# Altium PCB lps_regulator_rev_11.PcbDoc (part 1 of 2)
Units mil, origin at the board's own origin, x right, y up, seen from the top; angles counter-clockwise.
Board outline 5361 x 2466 mil, 2 copper layers (Top Layer, Bottom Layer); 135 components, 51 nets, 344 pads, 191 vias.
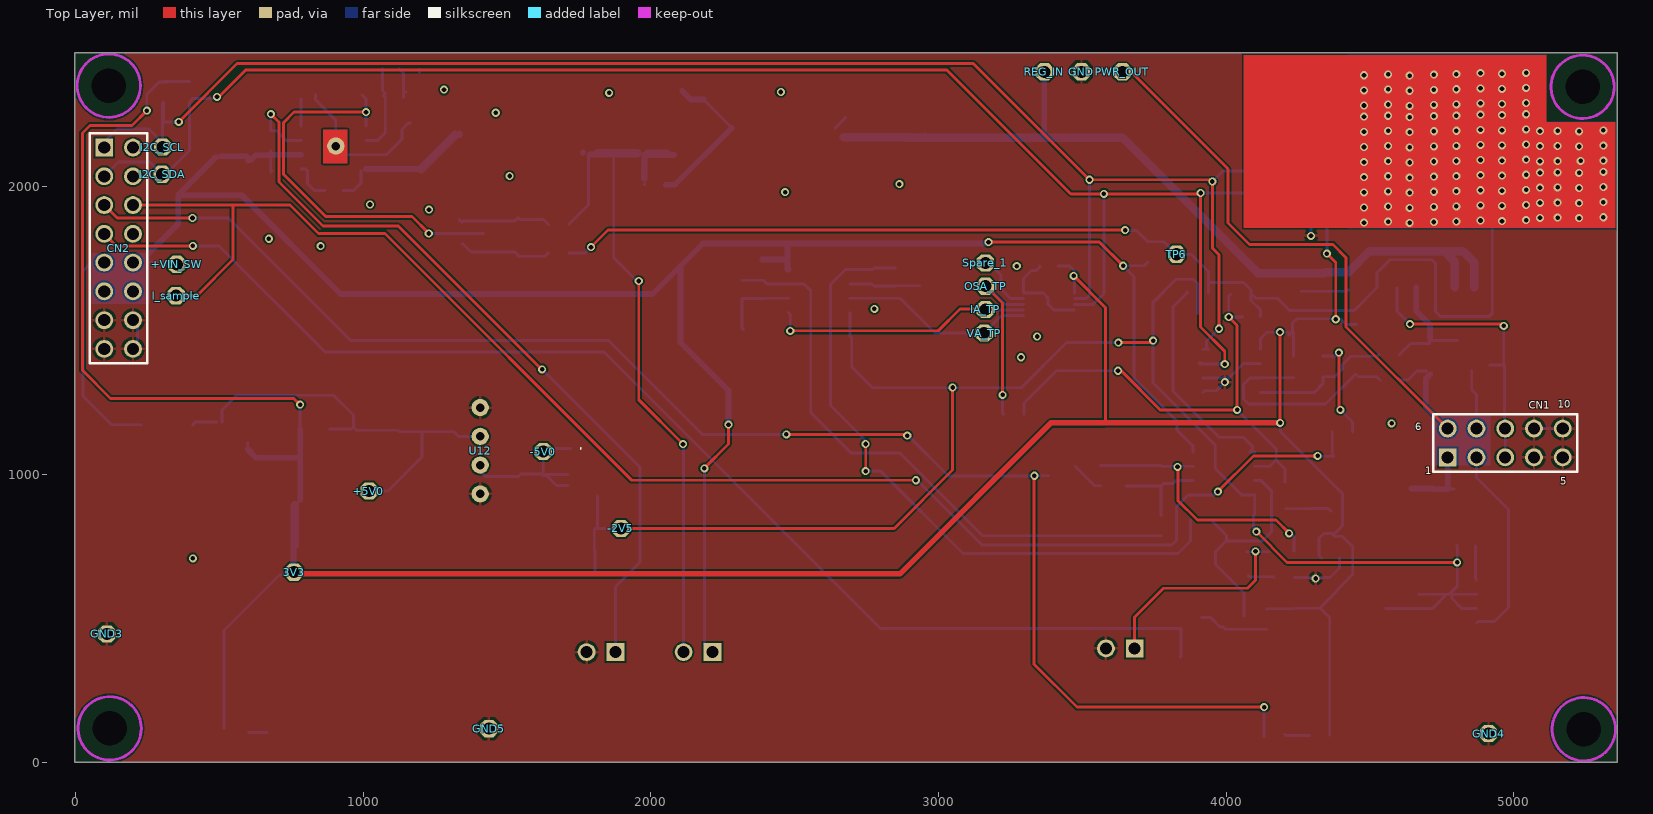
[diagram p0: Top Layer view]
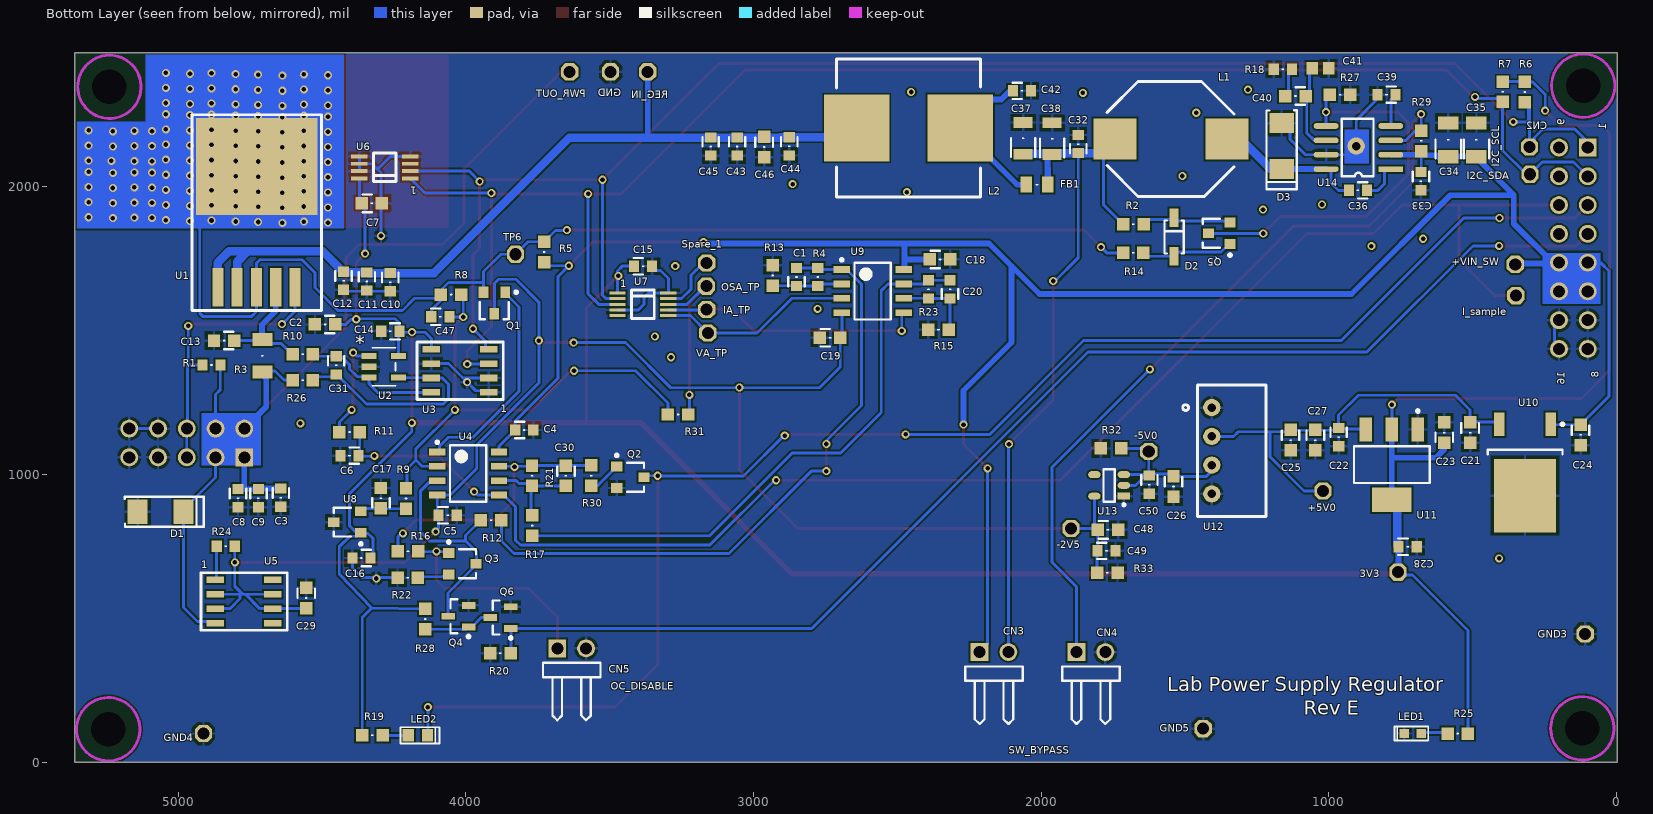
[diagram p1: Bottom Layer view, seen from below]
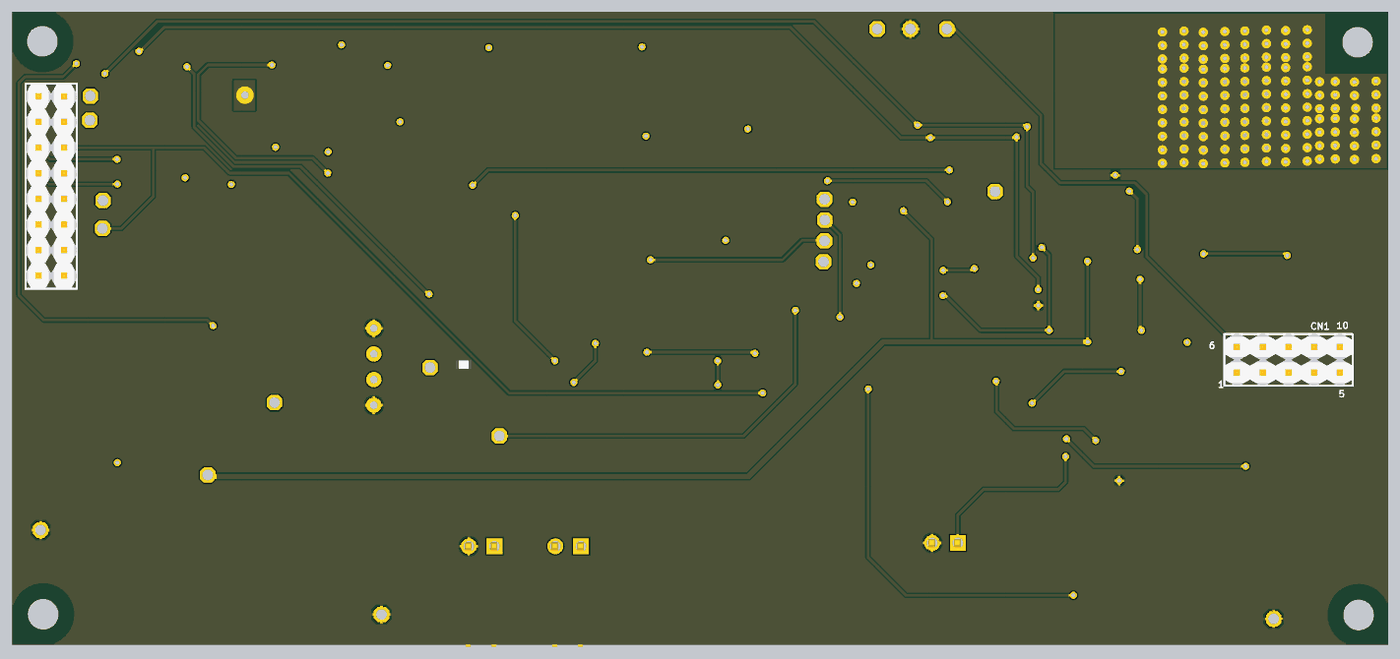
[diagram p3: 3D render of the assembled board from above, using the file's embedded part models]
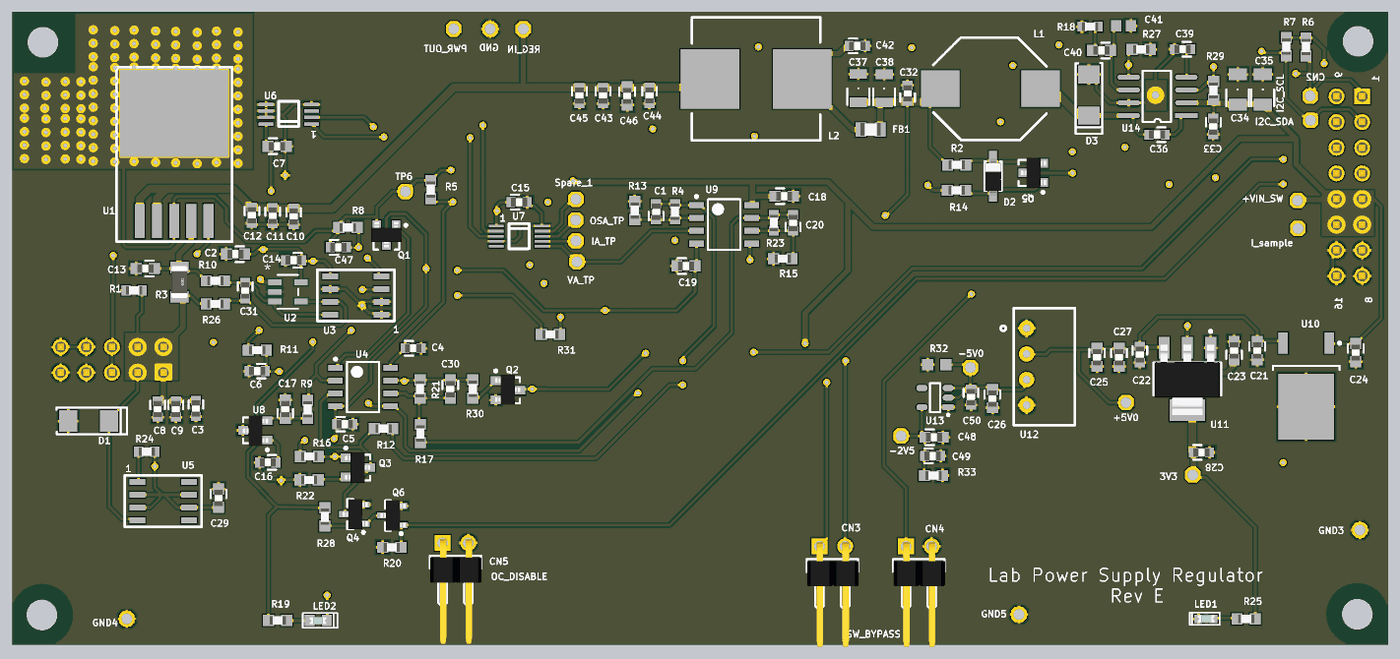
[diagram p4: 3D render of the assembled board from below, using the file's embedded part models]

## Layer stack, top to bottom
Top Solder: solder mask 0.4, Solder Resist, Dk 3.5
Top Layer: signal copper 1.4
Dielectric 1: dielectric 12.6, FR-4, Dk 4.8
Bottom Layer: signal copper 1.4
Bottom Solder: solder mask 0.4, Solder Resist, Dk 3.5

## Board outline
-2,0 5359,0 5359,2466 -2,2466

## Design rules (kind name [scope] priority, off if disabled: settings)
Clearance [All] p1: gap=6 ignorepadtopadclearanceinfootprint=FALSE except(0: Arc-Hole Track-Hole SMDPad-Hole THPad-Hole Via-Hole Fill-Hole Poly-Hole Region-Hole Text-Hole)
HoleSize [All] p1: absolutevalues=TRUE maxlimit=200 minlimit=1 maxpercent=80.000 minpercent=20.000
MinimumSolderMaskSliver [All] p1: minsoldermaskwidth=1
PolygonConnect [All] p1: connectstyle=Relief reliefconductorwidth=10 reliefentries=4 polygonreliefangle="90 Angle" airgapwidth=10
RoutingVias [All] p1: holewidth=28 width=50 viastyle="Through Hole" minholewidth=28 minwidth=50 maxholewidth=28 maxwidth=50
SilkToSilkClearance [All] p1: silktosilkclearance=2
SilkToSolderMaskClearance [IsPad] p1: minsilkscreentomaskgap=1 clearancetoexposedcopper=TRUE
SolderMaskExpansion [All] p1: expansion=4
Width [All] p1: maxlimit=50 minlimit=10 preferedwidth=10
26 further rules are at their usual default settings.

## Components (designator, comment, footprint, x,y, rotation, side; value= is the part's Value field where it differs from the comment)
3V3 "TestPoint_BLK" "TestPoint-TH 42 mil"#1 784,640 r90 top
+5V0 "TestPoint_BLK" "TestPoint-TH 42 mil"#2 1020,943 r90 top
+VIN_SW "TestPoint_BLK" "TestPoint-TH 42 mil"#2 352,1731 r90 top
-2V5 "TestPoint_BLK" "TestPoint-TH 42 mil"#2 1896,813 r90 top
-5V0 "TestPoint_BLK" "TestPoint-TH 42 mil"#2 1626,1080 r90 top
C1 "100pF" CAPC0603(1608)_N 2850.72,1687 r90 bottom
C2 "0.1uF" CAPC0603(1608)_M 4489,1522 r0 bottom
C3 "0.1uF" CAPC0603(1608)_N 4643,920 r270 bottom
C4 "0.1uF" CAPC0603(1608)_N 3797,1155 r180 bottom
C5 "0.1uF" CAPC0603(1608)_N 4063,859 r180 bottom
C6 "10uF" CAPC0603(1608)_N 4404.5,1066 r0 bottom
C7 "0.1uF" CAPC0603(1608)_M 4327,1943 r180 bottom
C8 "10uF" CAPC0603(1608)_N 4792,918 r270 bottom
C9 "10uF" CAPC0603(1608)_N 4721,918 r270 bottom
C10 "10uF" CAPC0603(1608)_N 4262.49,1669 r270 bottom
C11 "10uF" CAPC0603(1608)_N 4344,1671.5 r270 bottom
C12 "0.1uF" CAPC0603(1608)_N 4425,1674 r270 bottom
C13 "0.1uF" CAPC0603(1608)_M 4840,1466 r0 bottom
C14 "0.1uF" CAPC0603(1608)_N 4262.5,1498 r0 bottom
C15 "0.1uF" CAPC0603(1608)_N 3383.88,1724.56 r180 bottom
C16 "0.1uF" CAPC0603(1608)_N 4363,710 r0 bottom
C17 "1uF" CAPC0603(1608)_M 4295,918 r90 bottom
C18 "0.1uF" CAPC0603(1608)_M 2351.57,1748 r180 bottom
C19 "0.1uF" CAPC0603(1608)_M 2734,1476 r180 bottom
C20 "100pF" CAPC0603(1608)_N 2316.72,1644 r90 bottom
C21 "0.1uF" CAPC0603(1608)_M 509,1146 r270 bottom
C22 "10uF" CAPC0603(1608)_N 966,1130.43 r270 bottom
C23 "0.1uF" CAPC0603(1608)_M 599,1146 r90 bottom
C24 "1uF" CAPC0603(1608)_M 125,1138 r270 bottom
C25 "0.1uF" CAPC0603(1608)_M 1133,1120 r270 bottom
C26 "0.1uF" CAPC0603(1608)_M 1540,958.57 r270 bottom
C27 "10uF" CAPC0603(1608)_M 1047,1120 r270 bottom
C28 "10uF" CAPC0603(1608)_N 726,749 r180 bottom
C29 "0.1uF" CAPC0603(1608)_M 4555,571 r270 bottom
C30 "0.1uF" CAPC0603(1608)_M 3652,996 r270 bottom
C31 "0.1uF" CAPC0603(1608)_N 4451,1380 r270 bottom
C32 "0.1uF" CAPC0603(1608)_N 1871,2149 r90 bottom
C33 "0.01uF" CAPC0603(1608)_N 680,2020 r270 bottom
C34 "4.7uF" CAPC1206(3216)_N 585,2164 r90 bottom
C35 "4.7uF" CAPC1206(3216)_N 487,2164 r90 bottom
C36 "0.1uF" CAPC0603(1608)_N 899,1988 r0 bottom
C37 "47UF" CAPC1206(3216)_L 2063,2169 r90 bottom
C38 "47UF" CAPC1206(3216)_L 1962,2168 r90 bottom
C39 "0.01uF" CAPC0603(1608)_N 799.57,2321 r0 bottom
C40 "150pF" CAPC0603(1608)_M 1116,2316 r0 bottom
C41 "8.2nF" CAPC1608X87X35ML15T15 1029.46,2412 r0 bottom
C42 "0.1uF" CAPC0603(1608)_N 2067,2334 r180 bottom
C43 "10uF" CAPC0603(1608)_N 3057,2140.5 r270 bottom
C44 "0.1uF" CAPC0603(1608)_N 2876,2141 r270 bottom
C45 "10uF" CAPC0603(1608)_N 3149,2140.5 r270 bottom
C46 "1uF" CAPC0603(1608)_M 2963,2139 r270 bottom
C47 "0.1uF" CAPC0603(1608)_N 4088.5,1549 r180 bottom
C48 "0.1uF" CAPC0603(1608)_M 1768,808 r180 bottom
C49 "10uF" CAPC0603(1608)_N 1773,735 r180 bottom
C50 "10uF" CAPC0603(1608)_N 1624,965 r270 bottom
CN1 "Header 5X2A" HDR2X5_CEN 4770,1060 r0 top
CN2 "Header 8X2A" HDR2X8_CEN 100,2137 r270 top locked
CN3 "Header 2H" HDR1X2H 2214,383 r180 bottom
CN4 "Header 2H" HDR1X2H 1877,383 r180 bottom
CN5 "Header 2H" HDR1X2H 3682,396 r180 bottom
D1 "B340A" DO-214AC 5061,871 r180 bottom
D2 "1N4448W-E3-18" SOD123 1538,1826 r90 bottom
D3 "B340A" DO-214AC 1164.46,2142 r270 bottom
FB1 "300 Ohm @ 100MHz, 0805" RESC0805(2012)_N 2014.6,2008 r0 bottom
GND "TestPoint_BLK" "TestPoint-TH 42 mil"#3 3535,2385 r90 top
GND3 "TestPoint_BLK" "TestPoint-TH 42 mil"#2 109,446 r90 top
GND4 "TestPoint_BLK" "TestPoint-TH 42 mil"#4 4912,83 r90 top
GND5 "TestPoint_BLK" "TestPoint-TH 42 mil"#2 1437,117 r90 top
I2C_SCL "TestPoint_BLK" "TestPoint-TH 42 mil"#5 300.5,2142.57 r90 top
I2C_SDA "TestPoint_BLK" "TestPoint-TH 42 mil"#6 304,2046 r90 top
I_sample "TestPoint_BLK" "TestPoint-TH 42 mil"#2 350,1622 r90 top
IA_TP "TestPoint_BLK" "TestPoint-TH 42 mil"#2 3162.88,1574 r90 top
L1 "SSR1028 6.8uH" SRU1028 1373,2167 r0 bottom
L2 "SSR1210 100uH" SRR1210 2291,2205 r270 bottom
LED1 "0603 LED" SM-LED-0603#1 678.94,100 r180 bottom
LED2 "G" SM-LED-0603#2 4199.93,94 r0 bottom
OSA_TP "TestPoint_BLK" "TestPoint-TH 42 mil"#2 3163.88,1655 r90 top
PWR_OUT "TestPoint_BLK" "TestPoint-TH 42 mil"#7 3652,2385 r90 top
Q1 "MMBT2907A" SOT23#1 3901,1587 r0 bottom
Q2 "MMBT3904" SOT23#2 3428,991 r270 bottom
Q3 "MMBT3904" SOT23#2 4012,690 r270 bottom
Q4 "BSS123TA" SOT23-3L 4026,508 r0 bottom
Q5 "MMBT2907A" SOT23#1 1391,1839 r90 bottom
Q6 "BSS123TA" SOT23-3L 3879,503 r0 bottom
R1 "100" RESC0603(1608)_N 4884,1381 r0 bottom
R2 "10K" RESC0603(1608)_M#1 1679.57,1870 r180 bottom
R3 "0.33" RESC1206(3216)_N 4707,1413 r270 bottom
R4 "100" RESC0603(1608)_N 2776.72,1687 r90 bottom
R5 "10K" RESC0603(1608)_M#1 3728,1774 r90 bottom
R6 "10K" RESC0603(1608)_M#1 319,2330 r270 bottom
R7 "10K" RESC0603(1608)_M#1 396,2331 r270 bottom
R8 "10K" RESC0603(1608)_M#1 4051,1626 r180 bottom
R9 "10K" RESC0603(1608)_M#1 4208,917 r270 bottom
R10 "10K" RESC0603(1608)_M#1 4567,1418 r0 bottom
R11 "10K" RESC0603(1608)_M#1 4404,1148 r180 bottom
R12 "1.0K" RESC0603(1608)_M#1 3912,842 r0 bottom
R13 "1.0K" RESC0603(1608)_M#1 2933.72,1692 r270 bottom
R14 "10K" RESC0603(1608)_M#1 1680,1771 r0 bottom
R15 "1.0K" RESC0603(1608)_M#1 2357,1504 r180 bottom
R16 "1.0K" RESC0603(1608)_M#1 4201,733 r180 bottom
R17 "1.0K" RESC0603(1608)_M#1 3769,823 r90 bottom
R18 "33K" RESC0603(1608)_N 1160,2409 r0 bottom
R19 "1.0K" RESC0603(1608)_M#1 4324.57,94 r180 bottom
R20 "10K" RESC0603(1608)_M#1 3880,379 r0 bottom
R21 "100K" RESC0603(1608)_M#1 3770,996 r90 bottom
R22 "1.0K" RESC0603(1608)_M#1 4202,642 r0 bottom
R23 "100" RESC0603(1608)_N 2391.72,1644 r90 bottom
R24 "100" RESC0603(1608)_N 4834.61,751.44 r180 bottom
R25 "1.0K" RESC0603(1608)_M#1 552,100 r0 bottom
R26 "10K" RESC0603(1608)_M#1 4567,1328 r0 bottom
R27 "10K" RESC0603(1608)_M#1 961,2320 r180 bottom
R28 "10K" RESC0603(1608)_M#1 4141,498 r270 bottom
R29 "10K" RESC0603(1608)_M#1 679,2160 r90 bottom
R30 "1.0K" RESC0603(1608)_M#1 3564,996.57 r90 bottom
R31 "1.0K" RESC0603(1608)_M#1 3262,1209 r180 bottom
R32 "1.0K" RESC0603(1608)_M#2 1757,1091 r0 top
R33 "1.0K" RESC0603(1608)_M#1 1770,659 r180 bottom
REG_IN "TestPoint_BLK" "TestPoint-TH 42 mil"#8 3352,2391 r90 top
Spare_1 "TestPoint_BLK" "TestPoint-TH 42 mil"#2 3162.88,1736 r90 top
TP6 "TestPoint_BLK" "TestPoint-TH 42 mil"#2 3827,1766 r90 top
U1 "TPS7A4515KTTR" TPS7A4515KTTR 4862,1651 r180 bottom
U2 "INA180A1" SOT-23-5_MC 4285,1375 r180 bottom
U3 "INA219" INA219 3920,1286 r0 bottom
U4 "OPA2320" SOIC-8_NoPad 3992,1004 r180 bottom
U5 "LM334" LM334 4870.61,634 r180 bottom
U6 "mcp9808" 8MSOP 4193,2029.41 r0 bottom
U7 "mcp4728" MCP4728 3472.88,1631.37 r180 bottom
U8 "ISL21010CF315Z" SOT23#2 4412,835 r90 bottom
U9 "OPA2320" SOIC-8_NoPad 2585.72,1638 r180 bottom
U10 "LD29150DT50R" TO-252_N 318.13,1007.74 r270 bottom
U11 "LD1117S33" DSO-G3 781,1035 r0 bottom
U12 "ROE_5-5S" ROE_5-55 1405,1077 r270 top
U13 "TPS723" SOt-23-5 1712.64,925.2 r0 bottom
U14 "TPS54331" TPS54331 785,2062 r0 bottom
VA_TP "TestPoint_BLK" "TestPoint-TH 42 mil"#2 3158.88,1492 r90 top

## Footprints (in the part's own frame and the unit in brackets; to place one, negate y for a bottom-side part, rotate by r counter-clockwise, add the part's x,y. Pads: shape width x height; smd on the part's side, far side on the other; paste and mask are expansions set on the pad)
8MSOP [mm] "8MSOP"
  rect 1.448x0.35 smd: 1(0,0) 2(0,-0.65) 3(0,-1.3) 4(0,-1.95) 5(4.5,-1.3) 6(4.5,-1.95) 7(4.5,-0.65) 8(4.5,0)
  silkscreen extent 1.25,-2.25 3.25,0.25
CAPC0603(1608)_M [mm] "Chip Capacitor, Body 1.6x0.8mm, Height 1.0mm, IPC Low Density"
  rect 1.1x1.1 smd: 1(-0.9,0) 2(0.9,0)
  silkscreen extent -0.82,-0.78 0.05,0.78, body extent -0.8,-0.44 0.8,0.42, height 0.86
CAPC0603(1608)_N [mm] "Chip Capacitor, Body 1.6x0.8mm, Height 1.0mm, IPC Medium Density"
  rect 0.9x1 smd: 1(-0.8,0) 2(0.8,0)
  silkscreen extent -0.82,-0.73 0.05,0.73, body extent -0.8,-0.44 0.8,0.42, height 0.86
CAPC1206(3216)_L [mm] "Chip Capacitor, Body 3.2x1.6mm, Height 1.9mm, IPC High Density"
  rect 0.95x1.7 smd: 1(-1.4,0) 2(1.4,0)
  silkscreen extent -1.65,-1.08 0.05,1.07, body extent -1.7,-0.9 1.7,0.9, height 1.9
CAPC1206(3216)_N [mm] "Chip Capacitor, Body 3.2x1.6mm, Height 1.9mm, IPC Medium Density"
  rect 1.15x1.8 smd: 1(-1.5,0) 2(1.5,0)
  silkscreen extent -1.65,-1.13 0.05,1.13, body extent -1.7,-0.9 1.7,0.9, height 1.9
CAPC1608X87X35ML15T15 [mm] "Chip Capacitor, 2-Leads, Body 1.60x0.80mm, IPC Low Density"
  rect 1x1.1 smd: 1(-0.725,0) 2(0.725,0)
  body extent -0.87,-0.48 0.87,0.47, height 0.87
DO-214AC [mil] "2 Leads; Body 5.2 x 4.3mm, (LxW)"
  rect 70x85 smd: 1(-80,0) 2(80,0)
  silkscreen extent -125,-52 150,52, body extent -120,-50 120,50, height 96
DSO-G3 [mm] "SOT-223/SC-73; 4 Leads; Body 6.7 x 7.3 mm, inc. leads (LxW max)"
  rect 1.1x2.15 smd: 1(-2.3,-3.1) 2(0,-3.1) 3(2.3,-3.1)
  rect 3.5x2.15 smd: 4(0,3.1)
  silkscreen extent -3.35,-4.85 3.35,1.63, body extent -3.25,-3.4 3.25,3.56, height 1.68
HDR1X2H [mil] "Connector; Header; 2 Position; Right Angle"
  rect 62x62 hole 42: 1(0,0)
  round 62 hole 42: 2(100,0)
  silkscreen extent -50,-250 150,-50, body extent -48,-392 152,14, height 98
HDR2X5_CEN [mil] "Connector; Header; 5x2 Position"
  rect 62x62 hole 42: 1(0,0)
  round 62 hole 42: 2(100,0) 3(200,0) 4(300,0) 5(400,0) 6(0,100) 7(100,100) 8(200,100) 9(300,100) 10(400,100)
  silkscreen extent -50,-50 450,150, body extent -50,-50 450,150, height 330
HDR2X8_CEN [mil] "Connector; Header; 8x2 Position"
  rect 62x62 hole 42: 1(0,0)
  round 62 hole 42: 2(100,0) 3(200,0) 4(300,0) 5(400,0) 6(500,0) 7(600,0) 8(700,0) 9(0,100) 10(100,100) 11(200,100) 12(300,100) 13(400,100) 14(500,100) 15(600,100) 16(700,100)
  silkscreen extent -50,-50 750,150, body extent -50,-50 750,150, height 330
INA219 [mil] "Current Monitor"
  rect 61x23 smd: 1(0,0) 2(0,-50) 3(0,-100) 4(0,-150) 5(200,-150) 6(200,-100) 7(200,-50) 8(200,0)
  silkscreen extent -50,-175 250,25
LM334 [mil] "LM334, Current Source"
  rect 61x23 smd: 1(0,0) 2(0,-50) 3(0,-100) 4(0,-150) 5(200,-150) 6(200,-100) 7(200,-50) 8(200,0)
  silkscreen extent -50,-175 250,25
MCP4728 [mil] "12 bit, Quad DAC"
  rect 57x10 smd: 1(0,0) 2(0,-19.68) 3(0,-39.37) 4(0,-59.06) 5(0,-78.74) 6(177.17,-78.74) 7(177.17,-59.06) 8(177.17,-39.37) 9(177.17,-19.68) 10(177.17,0)
  silkscreen extent 49,-89 128,10
RESC0603(1608)_M#1 [mm] "Chip Resistor, Body 1.6x0.8mm, IPC Low Density"
  rect 1.1x1.1 smd: 1(-0.9,0) 2(0.9,0)
  silkscreen extent -0.05,-0.05 0.05,0.05, body extent -0.8,-0.43 0.8,0.43, height 0.51
RESC0603(1608)_M#2 [mm] "Chip Resistor, Body 1.6x0.8mm, IPC Low Density"
  rect 1.1x1.1 smd far side: 1(-0.9,0) 2(0.9,0)
  silkscreen extent -0.05,-0.05 0.05,0.05, body extent -0.8,-0.43 0.8,0.43, height 0.51
RESC0603(1608)_N [mm] "Chip Resistor, Body 1.6x0.8mm, IPC Medium Density"
  rect 0.9x1 smd: 1(-0.8,0) 2(0.8,0)
  silkscreen extent -0.05,-0.05 0.05,0.05, body extent -0.8,-0.43 0.8,0.43, height 0.51
RESC0805(2012)_N [mm] "Chip Resistor, Body 2.0x1.3mm, IPC Medium Density"
  rect 1.05x1.4 smd: 1(-0.95,0) 2(0.95,0)
  silkscreen extent -0.05,-0.05 0.05,0.05, body extent -1.01,-0.63 0.99,0.63, height 0.46
RESC1206(3216)_N [mm] "Chip Resistor, Body 3.2x1.6mm, IPC Medium Density"
  rect 1.15x1.8 smd: 1(-1.45,0) 2(1.45,0)
  silkscreen extent -0.05,-0.05 0.05,0.05, body extent -1.6,-0.8 1.6,0.8, height 1
ROE_5-55 [mil] "isolated DC/DC  converter"
  round 60 hole 30: 1(-156,2) 2(-56,2) 3(44,2) 4(144,2)
SM-LED-0603#1 [mm] "0603 LED"
  rect 0.8x0.8 smd: 1(0,0) 2(-1.5,0)
  silkscreen extent -2.35,-0.61 0.61,0.62, body extent -1.55,-0.36 0.1,0.37, height 0.67
SM-LED-0603#2 [mm] "0603 LED"
  rect 1x1.1 smd: 1(0,0) 2(-1.7,0)
  silkscreen extent -2.75,-0.71 0.69,0.74, body extent -1.65,-0.34 0,0.39, height 0.67
SOD123 [mm] "SOD-123; 2 Leads; Body 2.7 x 1.6 mm, (LxW)"
  rect 1.6x0.8 smd: 1(-1.7,0) 2(1.7,0)
  silkscreen extent -1.45,-0.85 1.45,0.85, body extent -1.93,-0.81 1.77,0.79, height 1.27
SOIC-8_NoPad [mm] "SOIC, 8-Leads, Body 4.90x3.90mm, Pitch 1.27mm, IPC Medium Density"
  rect 1.45x0.6 smd: 1(-2.725,1.905) 2(-2.725,0.635) 3(-2.725,-0.635) 4(-2.725,-1.905) 5(2.725,-1.905) 6(2.725,-0.635) 7(2.725,0.635) 8(2.725,1.905)
  silkscreen extent -2.85,-2.5 1.6,2.88, body extent -2,-2.5 2,2.5, height 1.75
SOT23#1 [mm] "SOT-23; 3 Leads; Body 3.0 x 2.5 mm, inc. leads (LxW max)"
  rect 0.85x1 smd: 1(-0.95,-1.2) 2(0.95,-1.2) 3(0,0.7)
  silkscreen extent -2.05,-1.32 1.28,1.2, body extent -1.5,-1.53 1.5,0.97, height 1.1
SOT23#2 [mm] "SOT-23; 3 Leads; Body 3.0 x 2.5 mm, inc. leads (LxW max)"
  rect 0.85x1 smd: 1(-0.95,-1.2) 2(0.95,-1.2) 3(0,1.2)
  silkscreen extent -2.05,-1.32 1.28,1.2, body extent -1.55,-1.27 1.45,1.23, height 1.1
SOT23-3L [mm] "SOT23, 3-Leads, Body 2.9x1.3mm, Pitch 0.95mm, Lead Span 2.5mm, IPC High Density"
  rect 1.2x0.6 smd: 1(-0.9,0.95) 2(-0.9,-0.95) 3(0.9,0)
  silkscreen extent -1.02,-1.5 0.7,1.92, body extent -1.34,-1.5 1.16,1.5, height 1.1
SOt-23-5 [mm] "SOt-23-5"
  rect 1.1x0.6 smd: 1(0,0)
  oval 1.1x0.6 smd: 2(0,-0.95) 3(0,-1.9) 4(2.6,-1.9) 5(2.6,0)
  silkscreen extent -0.1,-2.38 1.8,0.86
SOT-23-5_MC [mil]
  rect 52x22 smd paste+0 mask+0: 1(-51,37.4) 2(-51,0) 3(-51,-37.4) 4(51,-37.4) 5(51,37.4)
  silkscreen extent -41,-66 41,66, body extent 0,0 10,10, height 10
SRR1210 [mm] "SRR1210 inductor 100uH"
  rect 5.9x5.8 smd: 1(0,0.254) 2(0,-8.89)
  silkscreen extent -6.1,-10.67 6.1,2.03
SRU1028 [mm] "SRU1028 inductor 4.7uH"
  rect 3.8x3.6 smd: 1(-0.5,0) 2(9.4,0)
  silkscreen extent -1.1,-5.08 10.1,5.08
"TestPoint-TH 42 mil"#1 [mil] "Test Point - Thru-Hole 42 mil"
  oct 60x60 hole 42: 1(21,24)
"TestPoint-TH 42 mil"#2 [mil] "Test Point - Thru-Hole 42 mil"
  oct 60x60 hole 42: 1(0,0)
"TestPoint-TH 42 mil"#3 [mil] "Test Point - Thru-Hole 42 mil"
  oct 60x60 hole 42: 1(15,38)
"TestPoint-TH 42 mil"#4 [mil] "Test Point - Thru-Hole 42 mil"
  oct 60x60 hole 42: 1(17,0)
"TestPoint-TH 42 mil"#5 [mil] "Test Point - Thru-Hole 42 mil"
  oct 60x60 hole 42: 1(-4,-2)
"TestPoint-TH 42 mil"#6 [mil] "Test Point - Thru-Hole 42 mil"
  oct 60x60 hole 42: 1(-2,3)
"TestPoint-TH 42 mil"#7 [mil] "Test Point - Thru-Hole 42 mil"
  oct 60x60 hole 42: 1(15,13)
"TestPoint-TH 42 mil"#8 [mil] "Test Point - Thru-Hole 42 mil"
  oct 60x60 hole 42: 1(9,-16)
TO-252_N [mm] "D-PAK, 4-Leads, Body 6.1x6.5mm, Pitch 2.28mm, Lead Span 9.7mm, IPC Medium Density"
  rect 2.1x0.95 smd: 1(-4.25,2.28) 3(-4.25,-2.28)
  rect 6.5x5.5 smd: 4(2.05,0)
  silkscreen extent -4.37,-3.3 -1.6,3.43, body extent -2,-3.3 4.2,3.3, height 2.4
TPS7A4515KTTR [mil] "TPS7A4515KTTR"
  rect 39x134 smd: 1(0,0) 2(67,0) 3(134,0) 4(201,0) 5(268,0)
  rect 421x338.6 smd: 6(135,420)
  silkscreen extent -90,-80 360,600
TPS54331 [mm] "TPS54331 footprint"
  rect 2.2x0.5 smd: 1(0,0)
  oval 2.2x0.5 smd: 2(0,-1.27) 3(0,-2.54) 4(0,-3.81) 5(5.7,-3.81) 6(5.7,-2.54) 7(5.7,-1.27) 8(5.7,0)
  round 1.524 hole 0.762: 9(3.048,-2.032)
  Top Layer region: 1.934,-0.508 4.064,-0.508 4.064,-3.508 1.934,-3.508
  Bottom Layer region: 1.934,-0.508 4.064,-0.508 4.064,-3.508 1.934,-3.508
  silkscreen extent 1.52,-4.44 4.32,0.64

## Part data
3V3 +5V0 +VIN_SW -2V5 -5V0 GND GND3 GND4 GND5 I2C_SCL I2C_SDA I_sample IA_TP OSA_TP PWR_OUT REG_IN Spare_1 TP6 VA_TP: library part CMP-005-0210-01, "Test Point - Black", Color=Black, Manufacturer="Keystone Electronics", Manufacturer Part Number=5001, ComponentLink1Description=http://www.keyelco.com/product-pdf.cfm?p=1310, ComponentLink1URL=http://www.keyelco.com/product-pdf.cfm?p=1310, Component Name=TestPoint_BLK, Material="Base, Nylon 46, UL 94V-0", Mounting Type="0.040\" (1.02mm) Hole Diameter", Packaging=Bulk, Pin Count=1, Pricing 1="1=0.37, 10=0.316, 50=0.2298, 100=0.2209, 250=0.19832, 500=0.18932, 1000=0.1616, 2500=0.14424, 5000=0.13523 (USD)", RoHS="RoHS Compliant", Stock 1=335679, Terminal="0.010\" x 0.020\" (0.25mm x 0.51mm) Phosphor Bronze Wire, Silver Plated", Type="PC Test Point, Miniature"
C1 C20: library part CMP-007-0074-08, "CAP CER 100PF 50V 5% NP0 0603", Dielectric Material=Ceramic, Package (Imperial)=0603, Package (Metric)=1608, Temperature Coefficient="C0G, NP0", Tolerance=5%, Voltage (Rated)=100V, Capacitance=100pF, Mounting Type=SMD
C2 C3 C4 C5 C7 C12 C13 C14 C15 C16 C18 C19 C21 C23 C29 C30 C31 C32 C36 C42 C44 C47 C48: library part CMP-007-0042-08, "CAP CER 0.1UF 16V 10% X7R 0603", Capacitance=100nF, Dielectric Material=Ceramic, Package (Imperial)=0603, Package (Metric)=1608, Temperature Coefficient=X7R, Tolerance=10%, Voltage (Rated)=16V, Mounting Type=SMD
C6 C8 C9 C10 C11 C22 C28 C43 C45 C49 C50: library part CMP-001-0603-12, "CAP CER 10UF 16V X5R 0603", Capacitance=10µF, Dielectric Material=Ceramic, Package (Imperial)=0603, Package (Metric)=1005, Temperature (Max)=85°C, Temperature (Min)=-55°C, Temperature Coefficient=X5R, Tolerance=10%, Voltage (Rated)=16V, Height=800µm, Mounting Type=SMD, Width=800µm
C17 C24 C40 C46: library part CMP-007-0109-08, "CAP CER 1UF 35V 10% X5R 0603", Capacitance=1µF, Dielectric Material=Ceramic, Package (Imperial)=0603, Package (Metric)=1608, Temperature (Max)=85°C, Temperature (Min)=-55°C, Temperature Coefficient=X5R, Tolerance=10%, Voltage (Rated)=35V, Height=900µm, Length=1.6mm, Mounting Type=SMD, Width=800µm
C25 C26: library part "CAP CER 0.1UF 50V 10% X7R 0805", "0.1uF 0805 50V", Capacitance=0.1µF, Manufacturer=Kemet, Manufacturer Part Number=C0805C104K5RACTU, Operating Temperature="-55°C ~ 125°C", Package / Case="0805 (2012 Metric)", Ratings=-, Supplier Part Number 1=399-1170-1-ND, Temperature Coefficient=X7R, Tolerance=±10%, Voltage - Rated=50V, Applications="General Purpose", Category=Capacitors, ComponentLink1Description=http://www.kemet.com/datasheets&C0805C104K5RACTU, ComponentLink1URL=http://www.kemet.com/datasheets&C0805C104K5RACTU, Features=-, Height - Seated (Max)=-, Lead Spacing=-, Lead Style=-, Mounting Type="Surface Mount, MLCC", Packaging="Cut Tape (CT)", Pricing 1="1=0.1, 10=0.049, 25=0.0348, 50=0.0266, 100=0.0224, 250=0.01836, 1000=0.012 (USD)", RoHS="RoHS Compliant", Size / Dimension="0.079\" L x 0.049\" W (2.00mm x 1.25mm)", Stock 1=2639857, Supplier 1=Digi-Key, Thickness (Max)="0.035\" (0.88mm)"
C27: library part "CAP CER 10UF 16V 10% X5R 0805", "10UF 0805 16V", Capacitance=10µF, Manufacturer="Murata Electronics North America", Manufacturer Part Number=GRM21BR61C106KE15L, Operating Temperature="-55°C ~ 85°C", Package / Case="0805 (2012 Metric)", Ratings=-, Supplier Part Number 1=490-3886-1-ND, Temperature Coefficient=X5R, Tolerance=±10%, Voltage - Rated=16V, Applications="General Purpose", Category=Capacitors, ComponentLink1Description=http://www.murata.com/products/catalog/pdf/c02e.pdf, ComponentLink1URL=http://www.murata.com/products/catalog/pdf/c02e.pdf, Features=-, Height - Seated (Max)=-, Lead Spacing=-, Lead Style=-, Mounting Type="Surface Mount, MLCC", Packaging="Cut Tape (CT)", Pricing 1="1=0.25, 10=0.171, 50=0.1038, 100=0.0872, 250=0.07056, 500=0.06226, 1000=0.05291 (USD)", RoHS="RoHS Compliant", Size / Dimension="0.079\" L x 0.049\" W (2.00mm x 1.25mm)", Stock 1=1725870, Supplier 1=Digi-Key, Thickness (Max)="0.053\" (1.35mm)"
C33: library part CMP-007-0028-08, "CAP CER 0.01uF 50V 10% X7R 0603", Capacitance=10nF, Dielectric Material=Ceramic, Package (Imperial)=0603, Package (Metric)=1608, Temperature (Max)=125°C, Temperature (Min)=-55°C, Temperature Coefficient=X7R, Tolerance=10%, Voltage (Rated)=50V, Height=900µm, Length=1.6mm, Mounting Type=SMD, Width=800µm
C34 C35: library part CMP-007-0147-08, "CAP CER 4.7UF 50V 10% X7R 1206", Capacitance=4.7µF, Dielectric Material=Ceramic, Package (Imperial)=1206, Package (Metric)=3216, Temperature Coefficient=X7R, Tolerance=10%, Voltage (Rated)=16V, Mounting Type=SMD
C37 C38: library part CMP-001-0623-11, "CAP CER 47UF 25V 1206", Capacitance=47µF, Dielectric Material=Ceramic, Package (Imperial)=1206, Package (Metric)=3216, Temperature (Max)=85°C, Temperature (Min)=-55°C, Temperature Coefficient=X5R, Tolerance=20%, Voltage (Rated)=100V, Height=1.6mm, Length=3.2mm, Mounting Type=SMD
C39: library part CMP-007-0128-08, "CAP CER 22PF 50V 5% NP0 0603", Capacitance=22pF, Dielectric Material=Ceramic, Package (Imperial)=0603, Package (Metric)=1608, Temperature Coefficient="C0G, NP0", Tolerance=5%, Voltage (Rated)=50V, Mounting Type=SMD
C41: library part CMP-001-0751-01, "CAP CER 820PF 50V X7R 0603", Capacitance=820pF, Case/Package=0603, Case Code (Metric)=1608, Dielectric=X7R, Dielectric Material=Ceramic, Max Operating Temperature=125°C, Min Operating Temperature=-55°C, Package Quantity=1, Tolerance=10%, Voltage=50V, Case Code (Imperial)=0603, Contact Plating="Matte, Tin", Depth=0.8mm, Dissipation Factor=2.5%, Height=0.8mm, Lead Pitch=0.7mm, Length=1.6mm, Mount="PCB, Surface Mount", Packaging="Tape and Reel", Radiation Hardening=No, REACH SVHC="No SVHC", Termination=SMD/SMT, Thickness=0.034inch, Voltage Rating=50V, Voltage Rating (DC)=50V, Width=0.8mm
CN1: library part CMP-001-0310-01, "Header, 5-Pin, Dual row", Component Name="Header 5X2A", LatestRevisionDate=17-Jul-2002, LatestRevisionNote="Re-released for DXP Platform.", Pin Count=10, Publisher="Altium Limited"
CN2: library part CMP-001-0325-01, "Header, 8-Pin, Dual row", Component Name="Header 8X2A", LatestRevisionDate=17-Jul-2002, LatestRevisionNote="Re-released for DXP Platform.", Pin Count=16, Publisher="Altium Limited"
CN3 CN4 CN5: library part CMP-001-0287-01, "Header, 2-Pin, Right Angle", Current Rating="3A per Contact", Insulation Color=Black, Manufacturer="Harwin Inc.", Manufacturer Part Number=M20-9960245, Material Flammability Rating="UL94 V-0", Operating Temperature="-40°C ~ 105°C", Voltage Rating=-, Applications=-, ComponentLink1Description=https://cdn.harwin.com/pdfs/M20-996.pdf, ComponentLink1URL=https://cdn.harwin.com/pdfs/M20-996.pdf, Component Name="Header 2H", Connector Type="Header, Cuttable", Contact Finish - Mating=Gold, Contact Finish - Post=-, Contact Finish Thickness - Mating=-, Contact Finish Thickness - Post=-, Contact Length - Mating="0.240\" (6.10mm)", Contact Length - Post="0.118\" (3.00mm)", Contact Material=Brass, Contact Shape=Square, Contact Type="Male Pin", Fastening Type=-, Features=-, Ingress Protection=-, Insulation Height="0.100\" (2.54mm)", Insulation Material="Polyamide (PA6T), Nylon 6T", LatestRevisionDate=17-Jul-2002, LatestRevisionNote="Re-released for DXP Platform.", Mated Stacking Heights="11.72mm, 12.62mm, 12.72mm, 13.62mm, 18.22mm, 19.12mm", Mounting Type="Through Hole, Right Angle", Number of Positions=2, Number of Positions Loaded=All, Number of Rows=1, Overall Contact Length=-, Packaging=Bulk, Part Status=Active, Pin Count=2, Pitch - Mating="0.100\" (2.54mm)", Pricing 1="1=0.15, 10=0.141, 100=0.087, 500=0.072, 1000=0.063, 5000=0.054, 10000=0.0525 (USD)", Publisher="Altium Limited", RoHS="RoHS Compliant", Row Spacing - Mating=-, Shrouding=Unshrouded, Stock 1=17504, Style="Board to Board or Cable", Termination=Solder
D1 D3: library part CMP-001-0130-02, "DIODE SCHOTTKY 60V 3A", Capacitance @ Vr, F="250pF @ 4V, 1MHz", Current - Average Rectified (Io)=3A, Current - Reverse Leakage @ Vr="500µA @ 60V", Manufacturer="Micro Commercial Co", Manufacturer Part Number=SK36A-LTP, Operating Temperature - Junction="-50°C ~ 125°C", Package / Case="DO-214AC, SMA", Supplier Device Package="DO-214AC (SMA)", Voltage - Forward (Vf) (Max) @ If="750mV @ 3A", ComponentLink1Description=http://www.mccsemi.com/up_pdf/SK32A-LT~SK310A-LT(DO-214AC).PDF, ComponentLink1URL=http://www.mccsemi.com/up_pdf/SK32A-LT~SK310A-LT(DO-214AC).PDF, Component Name=SK36A-LTP, Diode Type=Schottky, Mounting Type="Surface Mount", Packaging="Cut Tape (CT)", Part Status=Active, Pin Count=2, Pricing 1="1=0.6, 10=0.42, 25=0.3448, 100=0.276, 250=0.20072, 500=0.1631, 1000=0.12545, 2500=0.11291 (USD)", RoHS="RoHS Compliant", Speed="Fast Recovery =< 500ns, > 200mA (Io)", Stock 1=26020
D2: library part CMP-001-0983-02, "Diodes - General Purpose, Power, Switching 100 Volt 500mA 4ns", Average Rectified Current=150mA, Max Operating Temperature=150°C, Max Power Dissipation=500mW, Max Repetitive Reverse Voltage (Vrrm)=100V, Max Reverse Leakage Current=5uA, Max Reverse Voltage (DC)=75V, Max Surge Current=500mA, Min Operating Temperature=-55°C, Package Quantity=10000, Contact Plating=Tin, Element Configuration=Single, Forward Current=150mA, Mount="Surface Mount", Packaging="Tape and Reel", Peak Non-Repetitive Surge Current=500mA, Recovery Time=4ns, Reverse Recovery Time=4ns, Weight=0.000363oz
FB1: library part CMP-007-0197-02, "600 Ohms @ 100MHz 1 Signal Line Ferrite Bead 0805 (2012 Metric) 2A 150mOhm", Current Rating=2A, DC Resistance (DCR)="150 mOhm Max", Impedance @ Frequency="600 Ohms @ 100MHz", Manufacturer="Wurth Electronics Inc", Manufacturer Part Number=742792040, Package="0805 (2012 Metric)", ComponentLink1Description=http://katalog.we-online.de/pbs/datasheet/742792040.pdf, ComponentLink1URL=http://katalog.we-online.de/pbs/datasheet/742792040.pdf, Component Name="FERRITE 600 OHM 2.0A 0805", Creator=osman, Filter Type="Differential Mode - Single", Height (Max)="0.043\" (1.10mm)", Mounting Type="Surface Mount", Packaging="Cut Tape (CT)", Pin Count=2, Pricing 1="1=0.24, 50=0.2344, 100=0.2156, 500=0.20624, 1000=0.19687, 2000=0.1875 (USD)", RoHS="RoHS Compliant", Size / Dimension="0.079\" L x 0.047\" W (2.00mm x 1.20mm)", Stock 1=34670
L1: library part CMP-001-0686-01, "INDUCTOR 6.8uH  SMD", Case/Package=8040, Current Rating=4.1A, DC Resistance (DCR)=18mR, Inductance=4.7uh, Inductance Tolerance=30%, Manufacturer 1="Taiyo Yuden", Manufacturer Part Number 1=NRS8040T4R7NJGJV, Max DC Current=5.4A, Max Operating Temperature=125°C, Min Operating Temperature=-25°C, Package Quantity=1000, Self Resonant Frequency=30MHz, Test Frequency=100kHz, Core Material=Ferrite, Depth=8.2mm, Halogen Free="Halogen Free", Height=4.2mm, Lead Free="Lead Free", Lead Pitch=5.6mm, Length=8mm, Mount="Surface Mount", Number of Pins=2, Packaging="Tape and Reel", Radiation Hardening=No, REACH SVHC=Unknown, RMS Current (Irms)=4.1A, Saturation Current=5.4A, Shielding=Shielded, Termination=SMD/SMT, Tolerance=30%, Width=0.315inch
L2: library part CMP-001-0686-01, "INDUCTOR 100uH 2.2A SMD", Case/Package=8040, Current Rating=4.1A, DC Resistance (DCR)=18mR, Inductance=4.7uh, Inductance Tolerance=30%, Manufacturer 1="Taiyo Yuden", Manufacturer Part Number 1=NRS8040T4R7NJGJV, Max DC Current=5.4A, Max Operating Temperature=125°C, Min Operating Temperature=-25°C, Package Quantity=1000, Self Resonant Frequency=30MHz, Test Frequency=100kHz, Core Material=Ferrite, Depth=8.2mm, Halogen Free="Halogen Free", Height=4.2mm, Lead Free="Lead Free", Lead Pitch=5.6mm, Length=8mm, Mount="Surface Mount", Number of Pins=2, Packaging="Tape and Reel", Radiation Hardening=No, REACH SVHC=Unknown, RMS Current (Irms)=4.1A, Saturation Current=5.4A, Shielding=Shielded, Termination=SMD/SMT, Tolerance=30%, Width=0.315inch
LED1: library part CMP-001-0009-04, "0603 SMD LED", Pin Count=2
LED2: library part "0603 LED", "0603 SMD LED", PN=P11500CT-ND, Vendor=Digikey
Q1 Q5: library part CMP-012-0075-02, "PNP General Purpose Amplifier", Current - Collector (Ic) (Max)=800mA, Current - Collector Cutoff (Max)=-, DC Current Gain (hFE) (Min) @ Ic, Vce="100 @ 150mA, 10V", Frequency - Transition=200MHz, Manufacturer="Fairchild Semiconductor", Package / Case="TO-236-3, SC-59, SOT-23-3", Power - Max=350mW, Supplier Device Package=SOT-23, Voltage - Collector Emitter Breakdown (Max)=60V, ComponentLink1Description=http://www.fairchildsemi.com/ds/MM/MMBT2907A.pdf, ComponentLink1URL=http://www.fairchildsemi.com/ds/MM/MMBT2907A.pdf, Component Name=MMBT2907A, Manufacturer Part Number=MMBT2907A, Mounting Type="Surface Mount", MPN=MMBT2907A, Packaging="Cut Tape (CT)", Pin Count=3, PN=MMBT2907AFSCT-ND, Pricing 1="1=0.2, 10=0.187, 25=0.17, 100=0.1224, 250=0.07208, 500=0.0598, 1000=0.04079 (USD)", RoHS="RoHS Compliant", Stock 1=74892, Transistor Type=PNP, Vce Saturation (Max) @ Ib, Ic="1.6V @ 50mA, 500mA", Vendor=Digikey
Q2 Q3: "NPN General Purpose Amplifier", Current - Collector (Ic) (Max)=200mA, Current - Collector Cutoff (Max)=-, DC Current Gain (hFE) (Min) @ Ic, Vce="100 @ 10mA, 1V", Frequency - Transition=300MHz, Manufacturer="ON Semiconductor", Manufacturer Part Number=MMBT3904WT1G, Package / Case="SC-70, SOT-323", Power - Max=150mW, Supplier Device Package="SC-70-3 (SOT323)", Supplier Part Number 1=MMBT3904WT1GOSCT-ND, Voltage - Collector Emitter Breakdown (Max)=40V, Category="Discrete Semiconductor Products", ComponentLink1Description=http://www.onsemi.com/pub_link/Collateral/MMBT3904WT1-D.PDF, ComponentLink1URL=http://www.onsemi.com/pub_link/Collateral/MMBT3904WT1-D.PDF, Mounting Type="Surface Mount", MPN=MMBT3904WT1G, Packaging="Cut Tape (CT)", PN=MMBT3904WT1GOSCT-ND, Pricing 1="1=0.17, 10=0.154, 25=0.1404, 100=0.101, 250=0.05952, 500=0.04938, 1000=0.03368 (USD)", RoHS="RoHS Compliant", Stock 1=3, Supplier 1=Digi-Key, Transistor Type=NPN, Vce Saturation (Max) @ Ib, Ic="300mV @ 5mA, 50mA", Vendor=Digikey
Q4 Q6: library part CMP-012-0021-01, "MOSFET N-CH 100V 170MA SOT23-3", Current - Continuous Drain (Id) @ 25°C="170mA (Ta)", Drive Voltage (Max Rds On,  Min Rds On)="4.5V, 10V", Manufacturer="Diodes Incorporated", Operating Temperature="-55°C ~ 150°C (TJ)", Package / Case="TO-236-3, SC-59, SOT-23-3", Power Dissipation (Max)="360mW (Ta)", Supplier Device Package=SOT-23-3, ComponentLink1Description=https://www.diodes.com/assets/Datasheets/BSS123.pdf, ComponentLink1URL=https://www.diodes.com/assets/Datasheets/BSS123.pdf, Component Name=BSS123TA, FET Feature=-, FET Type=N-Channel, Manufacturer Part Number=BSS123TA, Mounting Type="Surface Mount", Packaging="Cut Tape (CT)", Part Status=Active, Pin Count=3, Pricing 1="1=0.59, 10=0.418, 100=0.2742, 500=0.16202, 1000=0.12463 (USD)", Rds On (Max) @ Id, Vgs="6 Ohm @ 100mA, 10V", RoHS="RoHS Compliant", Stock 1=35338, Technology="MOSFET (Metal Oxide)", Vgs (Max)=±20V, Vgs(th) (Max) @ Id="2.8V @ 1mA"
R1 R24: library part CMP-007-0349-12, "RES 100 OHM 1% 1/10W 0603 2017", Operating Temperature="-55°C ~ 155°C", Package (Imperial)=0603, Package (Metric)=1608, Power=100mW, Temperature Coefficient=±100ppm/°C, Tolerance=1%, Height=550µm, Resistance=100, Termination=SMD/SMT
R2: library part CMP-007-0359-12, "RES 10K OHM 1/10W 1% 0603 SMD", Package (Imperial)=0603, Package (Metric)=1608, Power=100mW, Resistance=33K, Temperature Coefficient=±100ppm/°C, Tolerance=1%, Height=550µm, Termination=SMD/SMT
R3: library part CMP-007-0323-14, "RES 0.33 OHM 1% 1/4W 1206", Max Operating Temperature=125°C, Max Power Dissipation=250mW, Min Operating Temperature=-55°C, Package (Imperial)=1206, Package Quantity=1, Resistance=0.1, Temperature Coefficient=200ppm/°C, Tolerance=1%, Composition="Thick Film", Contact Plating=Tin, Depth=1.6mm, Features="Automotive AEC-Q200", Height=600µm, Length=3.2mm, Military Standard=Not, Mount="Surface Mount", Number of Pins=2, Number of Terminations=2, Package (Metric)=1206, Packaging="Tape and Reel", Power=250mW, Power Rating=250mW, Radiation Hardening=No, Termination=SMD/SMT, Width=1.6mm
R4: library part CMP-007-0349-12, "RES 100 OHM 1% 1/10W 0603 2017", Operating Temperature="-55°C ~ 155°C", Package (Imperial)=0603, Package (Metric)=1608, Power=100mW, Resistance=60K, Temperature Coefficient=±100ppm/°C, Tolerance=1%, Height=550µm, Termination=SMD/SMT
R5: library part CMP-007-0359-12, "RES 10K OHM 1/10W 1% 0603 SMD", Package (Imperial)=0603, Package (Metric)=1608, Power=100mW, Resistance=1k, Temperature Coefficient=±100ppm/°C, Tolerance=1%, Height=550µm, Termination=SMD/SMT
R6 R7 R8 R9 R11 R14 R20 R27 R28 R29: library part CMP-007-0359-12, "RES 10K OHM 1/10W 1% 0603 SMD", Package (Imperial)=0603, Package (Metric)=1608, Power=100mW, Resistance=10k, Temperature Coefficient=±100ppm/°C, Tolerance=1%, Height=550µm, Termination=SMD/SMT
R10 R26: library part CMP-007-0359-12, "RES 10K OHM 1/10W 1% 0603 SMD", Package (Imperial)=0603, Package (Metric)=1608, Power=100mW, Resistance=10, Temperature Coefficient=±100ppm/°C, Tolerance=1%, Height=550µm, Termination=SMD/SMT
R12 R17 R25 R32 R33: library part CMP-007-0404-12, "RES 1K OHM 1% 1/10W 0603", Operating Temperature="-55°C ~ 155°C", Package (Imperial)=0603, Package (Metric)=2012, Power=100mW, Resistance=1k, Temperature Coefficient=±100ppm/°C, Tolerance=1%, Height=550µm, Termination=SMD/SMT
R13 R16 R30: library part CMP-007-0404-12, "RES 1K OHM 1% 1/10W 0603", Operating Temperature="-55°C ~ 155°C", Package (Imperial)=0603, Package (Metric)=2012, Power=100mW, Resistance=10k, Temperature Coefficient=±100ppm/°C, Tolerance=1%, Height=550µm, Termination=SMD/SMT
R15: library part CMP-007-0404-12, "RES 1K OHM 1% 1/10W 0603", Operating Temperature="-55°C ~ 155°C", Package (Imperial)=0603, Package (Metric)=2012, Power=100mW, Resistance=DNL, Temperature Coefficient=±100ppm/°C, Tolerance=1%, Height=550µm, Termination=SMD/SMT
R18: library part CMP-007-0480-12, "RES 33K OHM 1/10W 5% 0603 SMD", Package (Imperial)=0603, Package (Metric)=1608, Power=100mW, Resistance=33k, Temperature Coefficient=±200ppm/°C, Tolerance=5%, Height=550µm, Termination=SMD/SMT
R19: library part CMP-007-0404-12, "RES 1K OHM 1% 1/10W 0603", Operating Temperature="-55°C ~ 155°C", Package (Imperial)=0603, Package (Metric)=2012, Power=100mW, Resistance=330, Temperature Coefficient=±100ppm/°C, Tolerance=1%, Height=550µm, Termination=SMD/SMT
R21: library part CMP-007-0353-12, "RES 100K OHM 1% 1/10W 0603", Operating Temperature="-55°C ~ 155°C", Package (Imperial)=0603, Package (Metric)=1608, Power=100mW, Resistance=1k, Temperature Coefficient=±100ppm/°C, Tolerance=1%, Height=550µm, Termination=SMD/SMT
R22: library part CMP-007-0404-12, "RES 1K OHM 1% 1/10W 0603", Operating Temperature="-55°C ~ 155°C", Package (Imperial)=0603, Package (Metric)=2012, Power=100mW, Resistance=100, Temperature Coefficient=±100ppm/°C, Tolerance=1%, Height=550µm, Termination=SMD/SMT
R23: library part CMP-007-0349-12, "RES 100 OHM 1% 1/10W 0603 2017", Operating Temperature="-55°C ~ 155°C", Package (Imperial)=0603, Package (Metric)=1608, Power=100mW, Resistance=5.1K, Temperature Coefficient=±100ppm/°C, Tolerance=1%, Height=550µm, Termination=SMD/SMT
R31: library part CMP-007-0404-12, "RES 1K OHM 1% 1/10W 0603", Operating Temperature="-55°C ~ 155°C", Package (Imperial)=0603, Package (Metric)=2012, Power=100mW, Resistance=100k, Temperature Coefficient=±100ppm/°C, Tolerance=1%, Height=550µm, Termination=SMD/SMT
U1: "TPS7A4515KTTR, linear regulator"
U3: "Current Monitor IC"
U4 U9: library part CMP-006-0027-01, "Dual Single Supply Rail-to-Rail OpAmp", Current - Supply=1.45mA, Manufacturer="Texas Instruments", Manufacturer Part Number=OPA2320AIDR, Operating Temperature="-40°C ~ 125°C", Package / Case="8-SOIC (0.154\", 3.90mm Width)", Supplier Device Package=8-SOIC, Voltage - Supply, Single/Dual (±)="1.8 V ~ 5.5 V, ±0.9 V ~ 2.75 V", Amplifier Type="General Purpose", Base Part Number=OPA2320, ComponentLink1Description=http://www.ti.com/lit/ds/symlink/opa2320.pdf, ComponentLink1URL=http://www.ti.com/lit/ds/symlink/opa2320.pdf, Component Name=OPA2320, Mounting Type="Surface Mount", Output Type=Rail-to-Rail, Packaging="Cut Tape (CT)", Part Status=Active, Pin Count=8, Pricing 1="1=3, 10=2.697, 100=2.2094, 500=1.88078, 1000=1.5862 (USD)", RoHS="RoHS Compliant", Slew Rate="10 V/µs", Source=OLogic-OpAmps.SCHLIB, Stock 1=3660
U5: "LM334, Current source"
U7: "MCP4728"